# Altium PCB integer layer.PcbDoc
Units mm, origin at the board's own origin, x right, y up, seen from the top; angles counter-clockwise.
Board outline 152.4 x 101.6 mm, 2 copper layers (Top Layer, Bottom Layer); 15 components, 45 nets, 183 pads, 0 vias.
Unrouted connection lines stored in the file: 104.
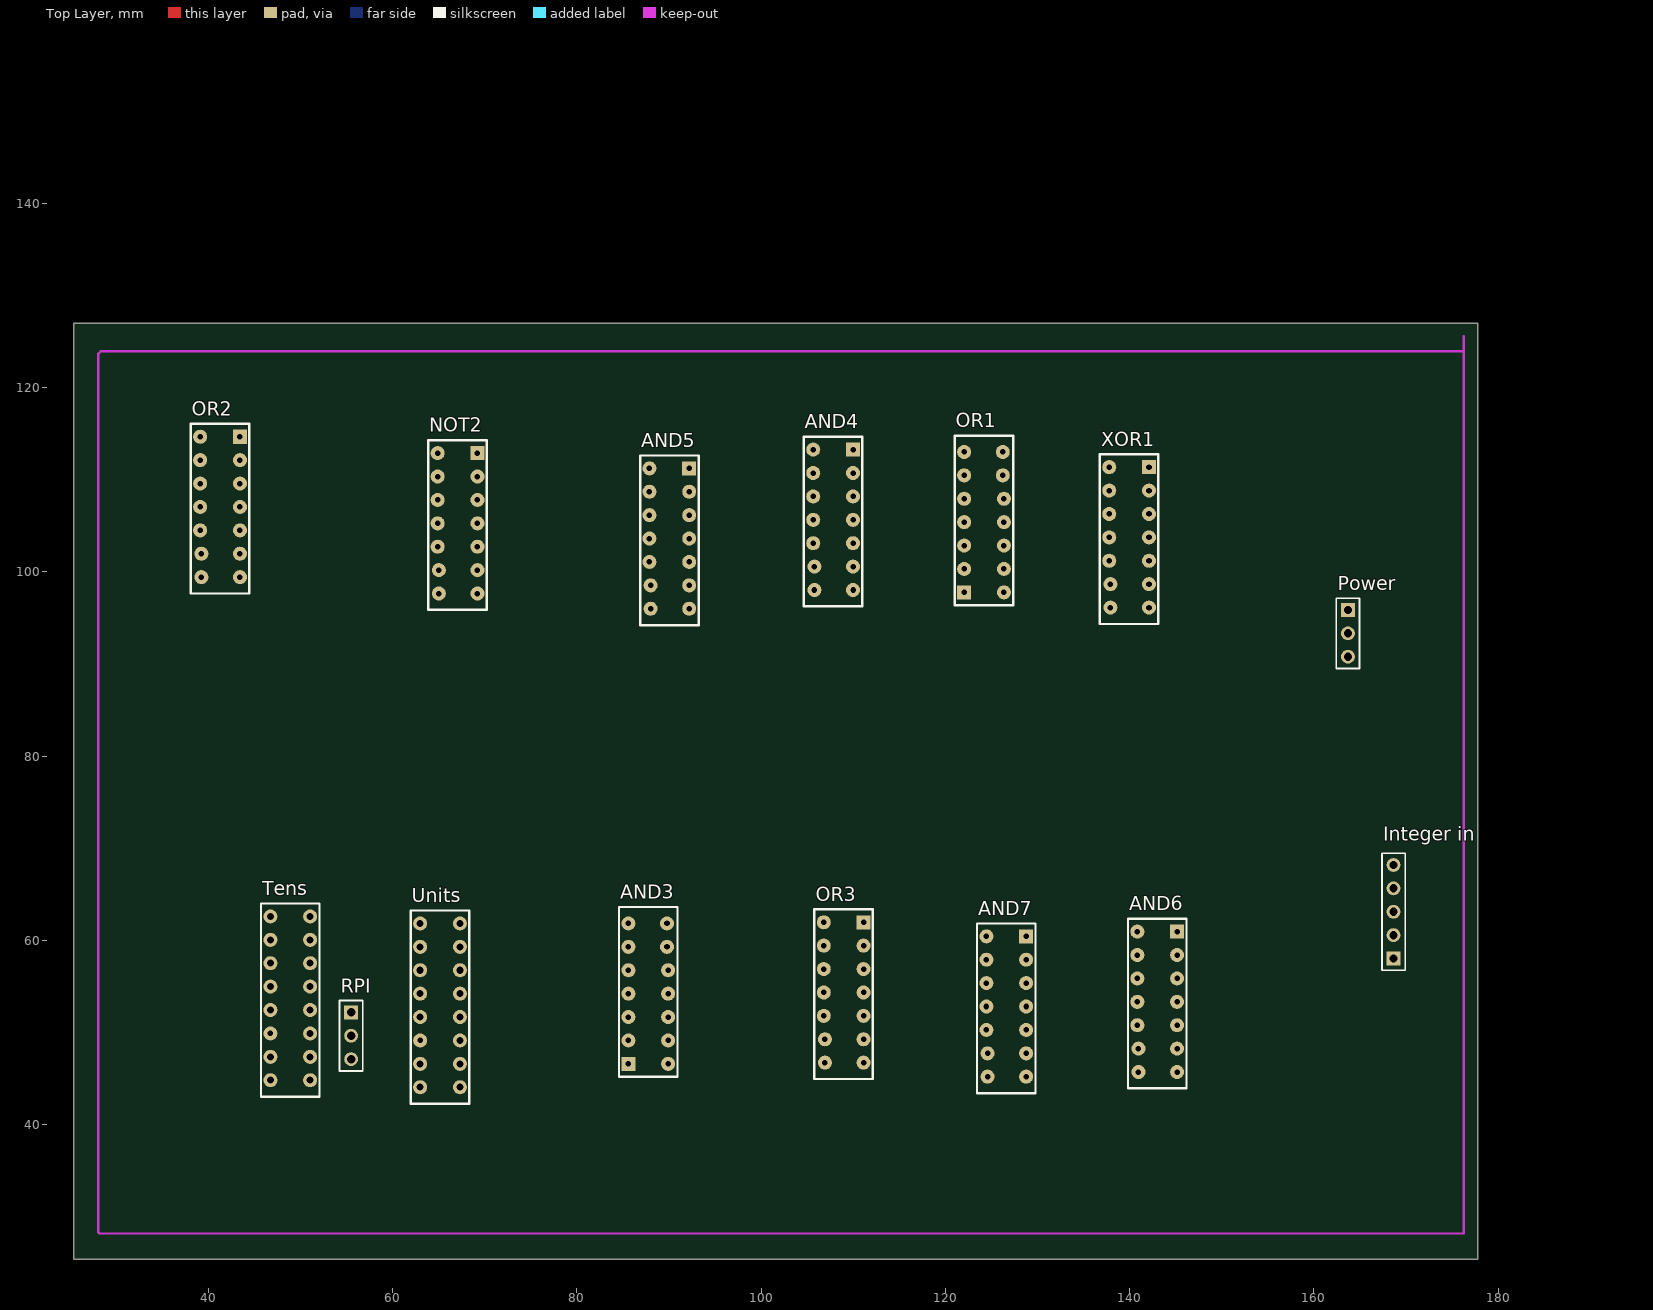
[diagram p0: Top Layer view]
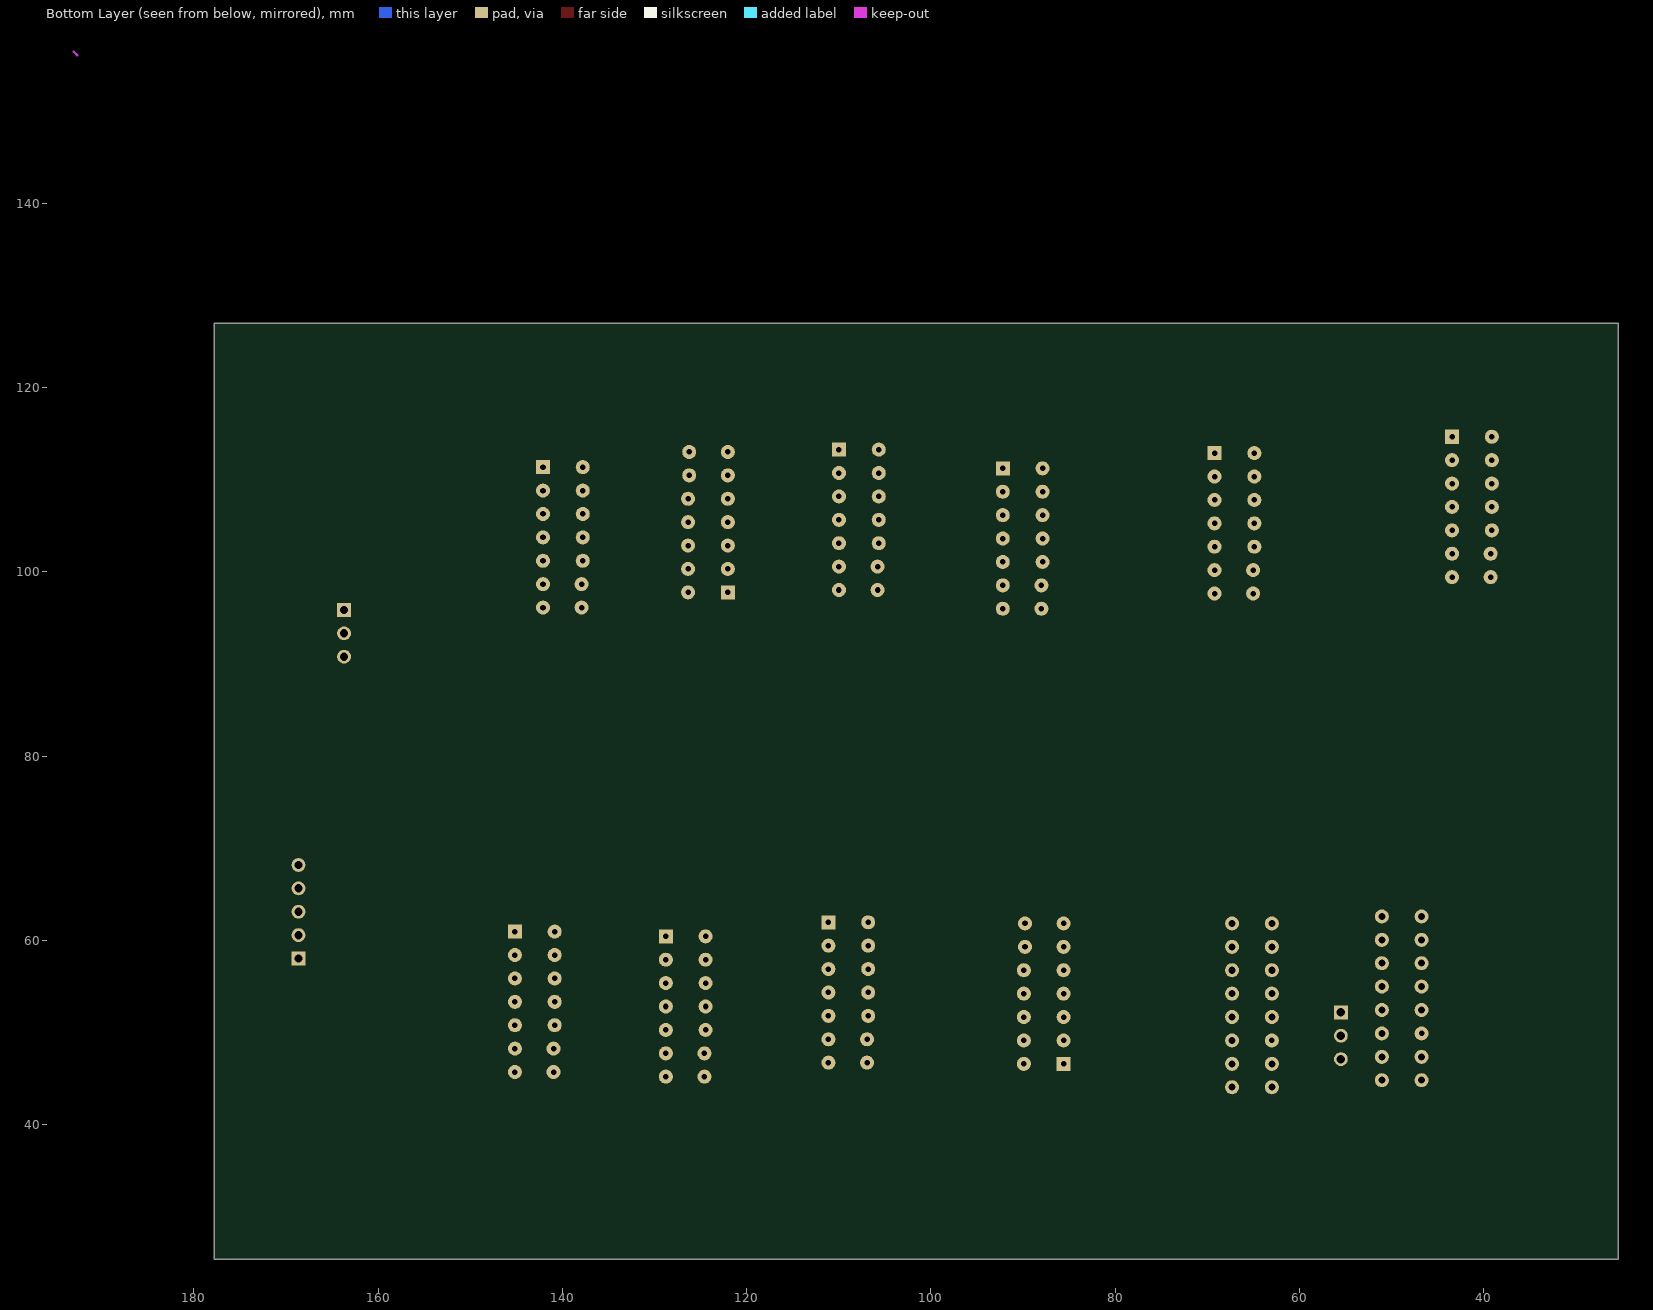
[diagram p1: Bottom Layer view, seen from below]

## Layer stack, top to bottom
Top Solder: solder mask 0.0102, Solder Resist, Dk 3.5
Top Layer: signal copper 0.0356
Dielectric 1: dielectric 0.32, FR-4, Dk 4.8
Bottom Layer: signal copper 0.0356
Bottom Solder: solder mask 0.0102, Solder Resist, Dk 3.5

## Board outline
25.4,25.4 177.8,25.4 177.8,127 25.4,127

## Design rules (kind name [scope] priority, off if disabled: settings)
Clearance [All] p1: gap=0.8 ignorepadtopadclearanceinfootprint=FALSE except(0: Arc-Hole Track-Hole SMDPad-Hole THPad-Hole Via-Hole Fill-Hole Poly-Hole Region-Hole Text-Hole; 0.254: Arc-SMDPad Arc-THPad Arc-Text Track-SMDPad Track-THPad Track-Text SMDPad-SMDPad SMDPad-THPad SMDPad-Text THPad-THPad THPad-Text Via-Text Fill-Text Poly-Text Region-Text Text-Text)
PolygonConnect [All] p1: connectstyle=Relief reliefconductorwidth=0.254 reliefentries=4 polygonreliefangle="90 Angle" airgapwidth=0.254
RoutingLayers [All] p1: top layer_v5=TRUE bottom layer_v5=FALSE
RoutingVias [All] p1: holewidth=0.711 width=1.27 viastyle="Through Hole" minholewidth=0.711 minwidth=1.27 maxholewidth=0.711 maxwidth=1.27
SolderMaskExpansion [All] p1: expansion=0.102
Width [All] p1: maxlimit=0.254 minlimit=0.254 preferedwidth=0.254
29 further rules are at their usual default settings.

## Components (designator, comment, footprint, x,y, rotation, side; value= is the part's Value field where it differs from the comment)
AND3 "Component_1" Gate? 88.138,47.117 r180 top
AND4 "Component_1" Gate? 107.442,112.776 r0 top
AND5 "Component_1" Gate? 89.662,110.744 r0 top
AND6 "Component_1" Gate? 142.621,60.452 r0 top
AND7 "Component_1" Gate? 126.238,59.944 r0 top
"Integer in" "Header 5" HDR1X5 168.656,58.039 r90 top
NOT2 "Component_1" Gate? 66.675,112.395 r0 top
OR1 "Component_1" Gate? 124.587,98.298 r180 top
OR2 "Component_1" Gate? 40.894,114.173 r0 top
OR3 "Component_1" Gate? 108.585,61.468 r0 top
Power "Header 3" HDR1X3 163.703,95.885 r270 top
RPI "Header 3" HDR1X3 55.499,52.197 r270 top
Tens "Component_1" 7483 48.514,59.563 r0 top
Units "Component_1" 7483 64.77,58.801 r0 top
XOR1 "Component_1" Gate? 139.573,110.871 r0 top

## Footprints (in the part's own frame and the unit in brackets; to place one, negate y for a bottom-side part, rotate by r counter-clockwise, add the part's x,y. Pads: shape width x height; smd on the part's side, far side on the other; paste and mask are expansions set on the pad)
7483 [mil]
  round 60 hole 30: A1(100,-480) A2(-70,-580) A3(-70,-80) A4(-70,120) B1(100,-380) B2(-70,-480) B3(-70,-180) B4(100,120) C0(100,-180) C1(100,-580) C3(-70,20) C4(100,20) C5(100,-80) GND(100,-280) Vcc(-70,-280)
  round 60 hole 23.62: C2(-70,-380)
  silkscreen extent -110,-650 140,175
Gate? [mil]
  round 60 hole 23.62: 1(-70,20) 2(-70,-80) 3(-70,-180) 4(-70,-280) 5(-70,-380) 6(-65,-480) 7(-65,-580) 8(100,-580) 9(100,-480) 10(100,-380) 11(100,-280) 12(100,-180) 13(100,-80)
  rect 60x60 hole 23.62: 14(100,20)
  silkscreen extent -110,-650 140,75
HDR1X3 [mm] "Connector; Header; 3 Position"
  rect 1.5x1.5 hole 0.9: 1(0,0)
  round 1.5 hole 0.9: 2(2.54,0) 3(5.08,0)
  silkscreen extent -1.27,-1.27 6.35,1.27
HDR1X5 [mm] "Connector; Header; 5 Position"
  rect 1.5x1.5 hole 0.9: 1(0,0)
  round 1.5 hole 0.9: 2(2.54,0) 3(5.08,0) 4(7.62,0) 5(10.16,0)
  silkscreen extent -1.27,-1.27 11.43,1.27

## Part data
"Integer in": "Header, 5-Pin", LatestRevisionDate=17-Jul-2002, LatestRevisionNote="Re-released for DXP Platform.", Publisher="Altium Limited"
Power RPI: "Header, 3-Pin", LatestRevisionDate=17-Jul-2002, LatestRevisionNote="Re-released for DXP Platform.", Publisher="Altium Limited"

## Nets (pads, with @x,y where several pads share a name; then routed paths per layer and width w, separated by ;. In a path a pad name is that pad's centre, name@x,y a point inside that pad or via, vN(x,y) a via of type N, cw(c..) or ccw(c..) an arc to the next point about the centre after c; other vN are vias at no path point)
(~Y&~X)+Z: AND4.13 OR2.8
(~Z+X)&Y&~MSB: AND5.6 OR3.1
"A out": OR2.3 OR2.4
C1: OR2.6 Units.A4
C2: OR3.3 Units.C3
C3: AND7.3 Units.C2
C3/~Y: AND7.1 OR3.6
C4: OR3.8 Tens.B2
C4-YZ: OR3.10 OR3.11
C5: AND3.8 Tens.A4
GND: AND3.7 AND4.7 AND5.7 AND6.7 AND7.7 NOT2.7 OR1.7 OR2.7 OR3.7 Power.2 RPI.3 Tens.A2 Tens.C2 Tens.C3 Units.A2 XOR1.7
LSB: "Integer in.5" Units.B2
MSB: "Integer in.1" AND3.9 AND4.1 AND4.12 AND6.5 AND7.9 NOT2.1 XOR1.12
MSB&((~Y&~X)+Z): AND4.11 OR3.2
MSB&~X: AND4.3 AND4.4
MSB&~X&~Y: AND4.6 AND4.9
MSB&~X&~Y&~Z: AND4.8 OR2.5
MSB&~Y&~Z: AND7.8 OR3.13
"RPI Switch": RPI.2 Tens.Vcc Units.Vcc
Sign: Power.3
Vcc: AND3.14 AND4.14 AND5.14 AND6.14 AND7.14 NOT2.14 OR1.14 OR2.14 OR3.14 Power.1 RPI.1 Tens.A3 Tens.B3 Tens.B4 Units.A3 Units.B3 Units.B4 XOR1.14
X: "Integer in.4" AND3.1 AND5.9 AND6.1 NOT2.13 OR2.12 XOR1.10
X&Z&~MSB: AND5.8 OR3.12
X&~(Z^MSB): AND3.3 OR2.1
X&~Z: AND6.3 AND6.4
X&~Z&MSB: AND6.6 OR3.4
X^Z: AND3.5 XOR1.8
Y: "Integer in.3" AND3.4 AND5.1 AND7.4 NOT2.5 OR1.5
Y&(X^Z): AND3.6 OR2.2
Y&Z: AND7.6 OR3.9
Y&~MSB: AND5.3 AND5.4
Z: "Integer in.2" AND5.12 AND6.13 AND7.5 NOT2.3 OR1.4 OR2.9 XOR1.9 XOR1.13
Z&~MSB: AND5.10 AND5.11
Z&~X: AND6.10 AND6.11
Z&~X&~MSB: AND6.8 OR3.5
Z+Y: AND3.10 OR1.6
Z^MSB: NOT2.11 XOR1.11
~(Z^MSB): AND3.2 NOT2.10
~MSB: AND5.2 AND5.13 AND6.9 NOT2.2
~X: AND4.2 AND6.12 NOT2.12
~Y: AND4.5 AND7.2 AND7.13 NOT2.6
~Y&~X: OR2.10
~Y&~Z: AND7.10 AND7.11
~Z: AND4.10 AND6.2 AND7.12 NOT2.4 OR2.13
~Z+X: AND5.5 OR2.11
pads on no net: AND3.11 AND3.12 AND3.13 NOT2.8 NOT2.9 OR1.1 OR1.2 OR1.3 OR1.8 OR1.9 OR1.10 OR1.11 OR1.12 OR1.13 Tens.A1 Tens.B1 Tens.C0 Tens.C1 Tens.C4 Tens.C5 Tens.GND Units.A1 Units.B1 Units.C0 Units.C1 Units.C4 Units.C5 Units.GND XOR1.1 XOR1.2 XOR1.3 XOR1.4 XOR1.5 XOR1.6

## Keep-outs
Top Layer:
  lines w0.254: 176.276,123.952 28.321,123.952 28.067,123.698 28.067,28.321 28.194,28.194 176.276,28.194 176.276,125.603
Bottom Layer:
  lines w0.254: 192.659,156.083 193.04,156.464